# Altium PCB Flow_Pump显示板 - 副本.PcbDoc
Units mil, origin at the board's own origin, x right, y up, seen from the top; angles counter-clockwise.
Board outline 3661.42 x 3661.42 mil, 2 copper layers (Top Layer, Bottom Layer); 9 components, 0 nets, 67 pads, 0 vias.
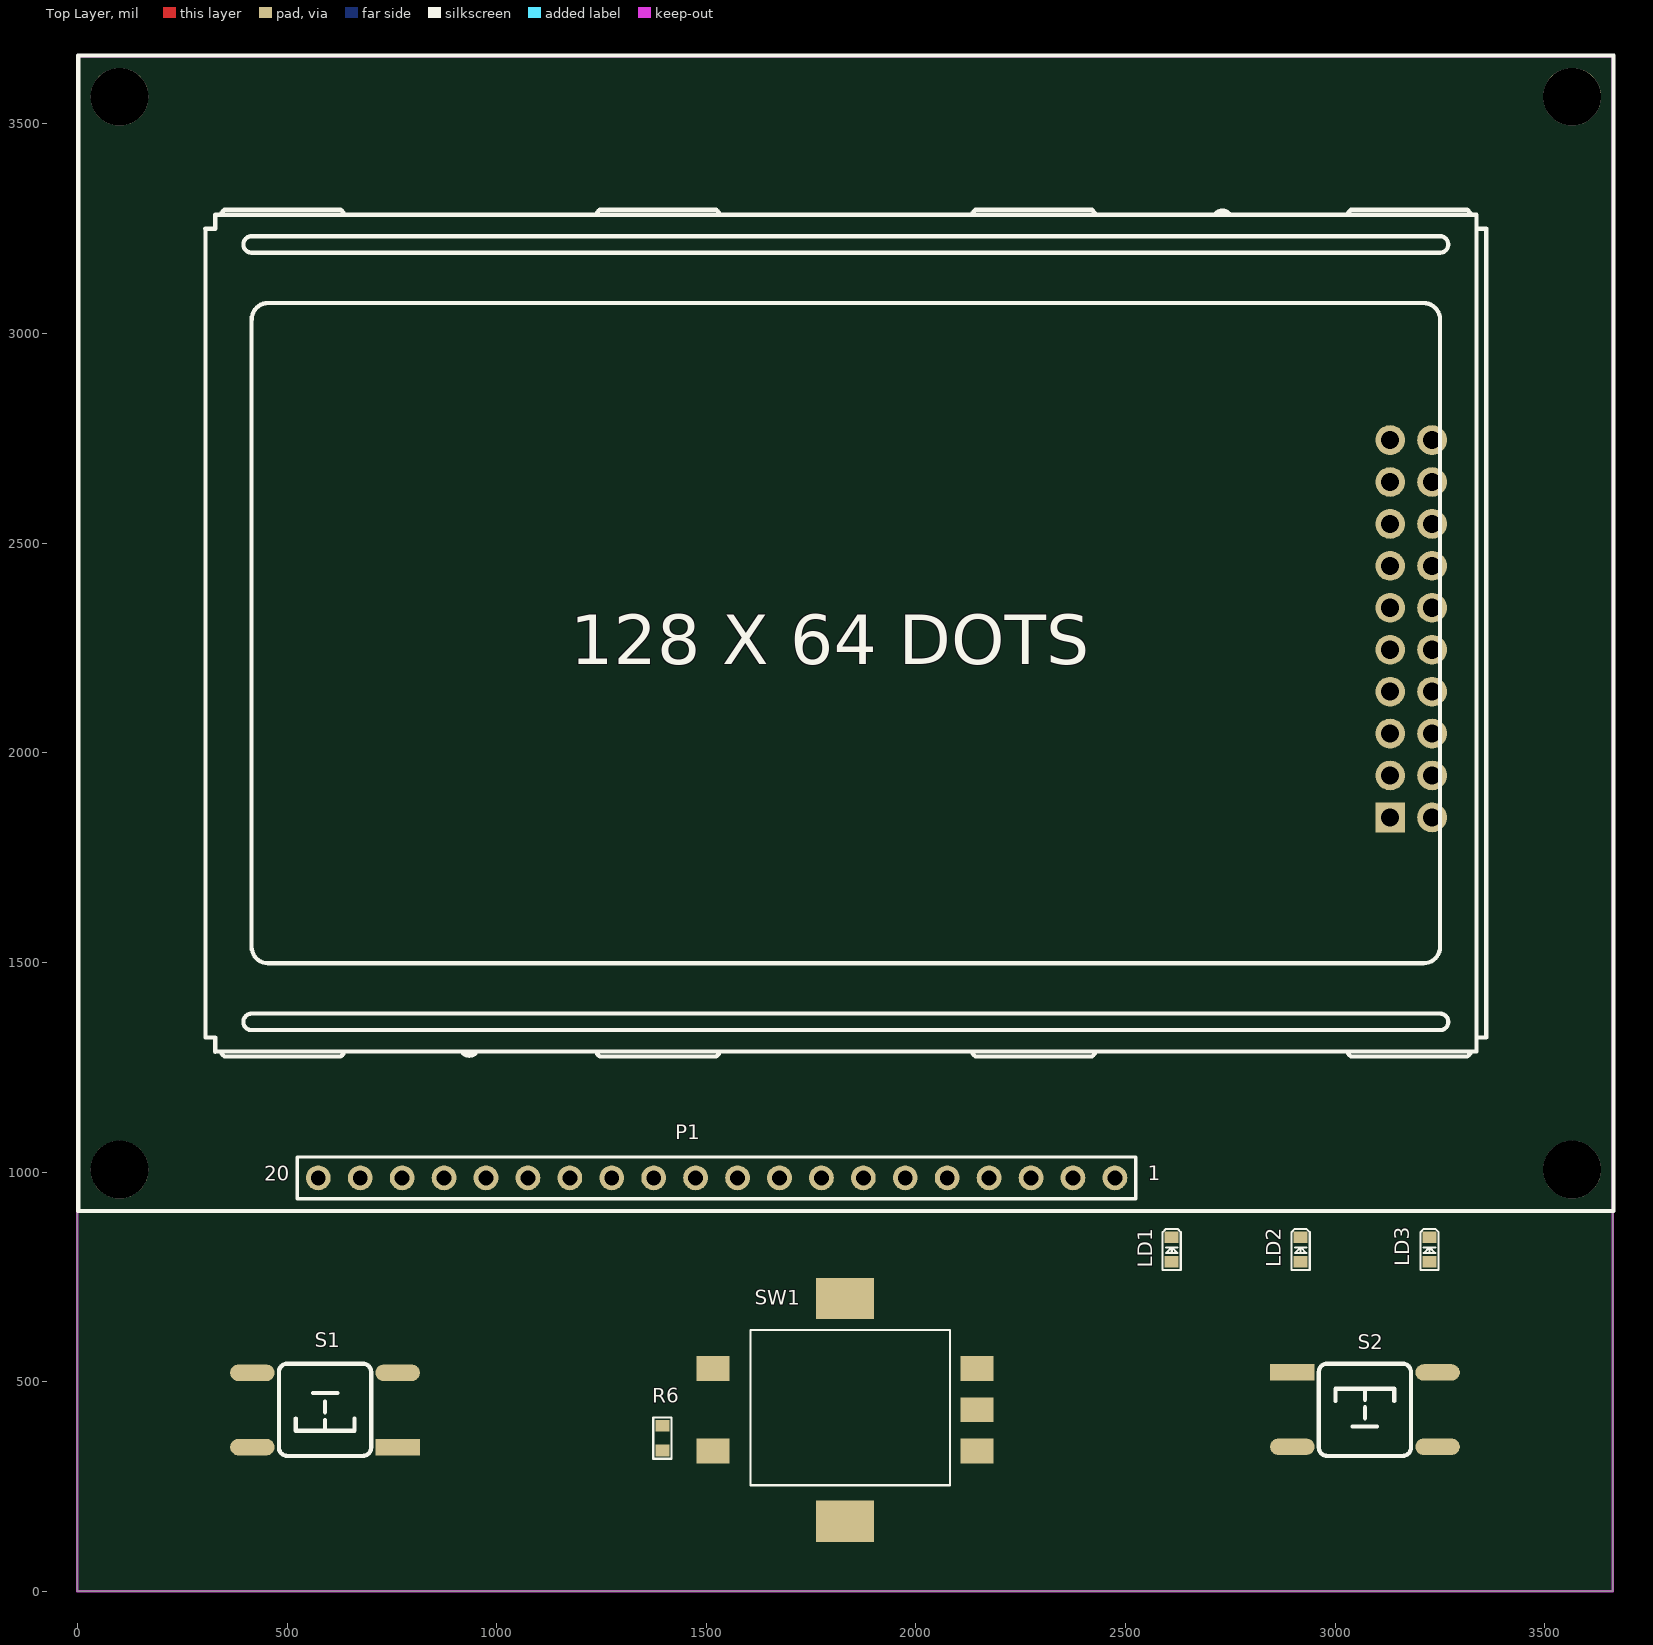
[diagram p0: Top Layer view]
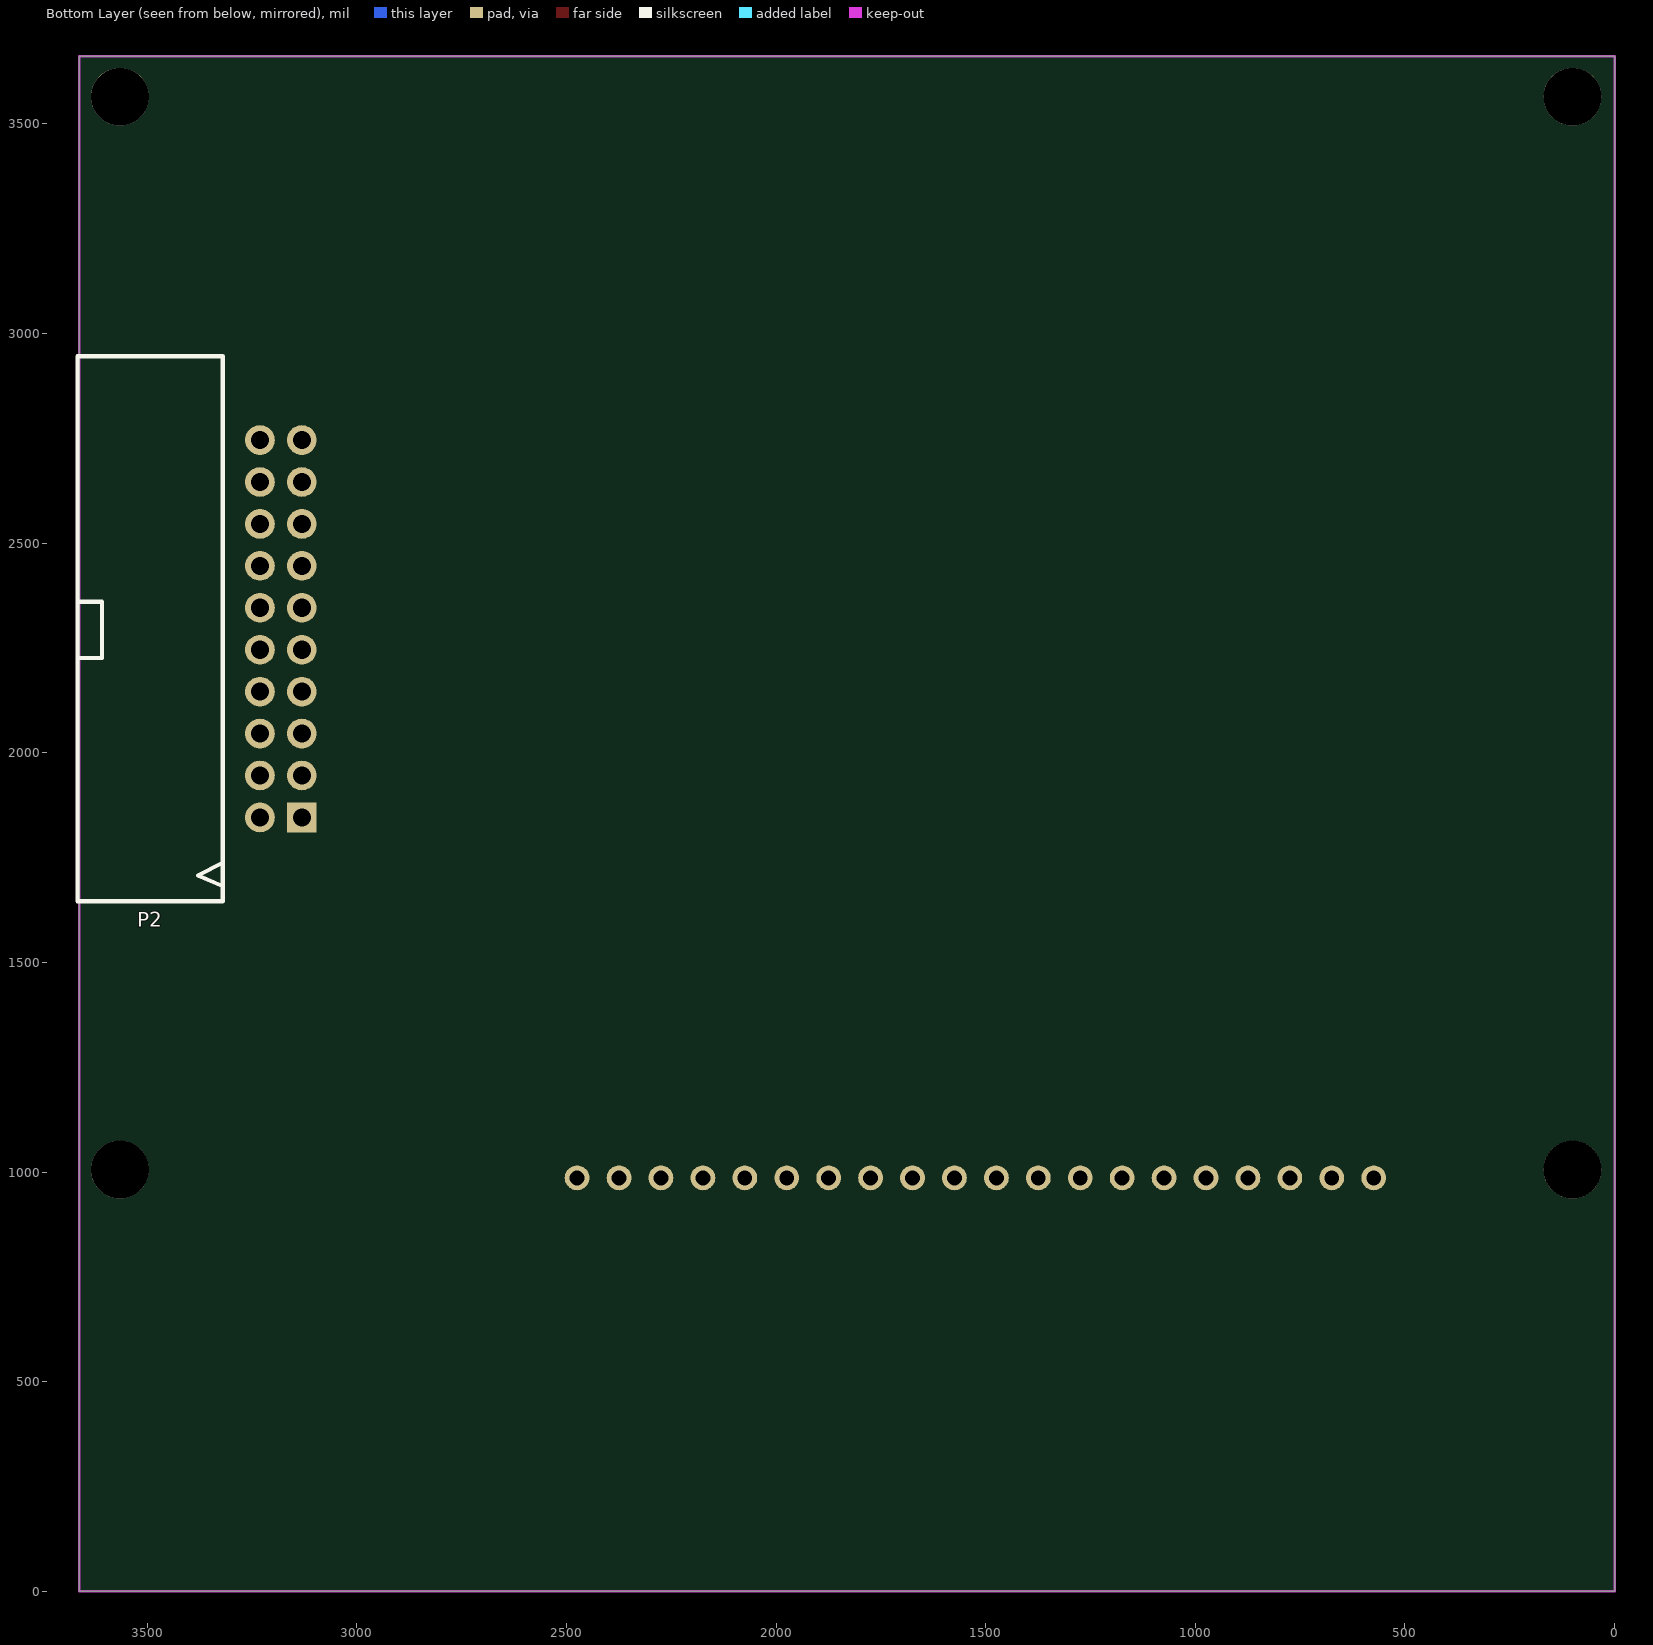
[diagram p1: Bottom Layer view, seen from below]

## Layer stack, top to bottom
Top Solder: solder mask 0.4, Solder Resist, Dk 3.5
Top Layer: signal copper 1.4
Dielectric 1: dielectric 12.6, FR-4, Dk 4.8
Bottom Layer: signal copper 1.4
Bottom Solder: solder mask 0.4, Solder Resist, Dk 3.5

## Board outline
0,0 3661.42,0 3661.42,3661.42 0,3661.42

## Design rules (kind name [scope] priority, off if disabled: settings)
Clearance [All] p1: gap=10
PolygonConnect [All] p1: connectstyle=Relief reliefconductorwidth=10 reliefentries=4 polygonreliefangle="90 Angle" airgapwidth=10
RoutingVias [All] p1: holewidth=28 width=50 viastyle="Through Hole" minholewidth=28 minwidth=50 maxholewidth=28 maxwidth=50
SolderMaskExpansion [All] p1: expansion=4
Width [All] p1: maxlimit=10 minlimit=10 preferedwidth=10
30 further rules are at their usual default settings.

## Components (designator, comment, footprint, x,y, rotation, side; value= is the part's Value field where it differs from the comment)
LD1 "LED_Green_19-217" 0603led 2610,786 r90 top
LD2 "LED_Green_19-217" 0603led 2917.5,786 r90 top
LD3 "LED_Green_19-217" 0603led 3225,786 r90 top
P1 "LCD12864" LCD12864 1517.05,1143.94 r0 top locked
P2 "Header 10X2" IDC-TH_20P-L33.0-W13.8-H-M-R2-C10-P2.54-S2.54-TR 3181,2296 r270 bottom
R6 "4.7K" 0603R 1395,395 r270 top
S1 "SW-PB" "TSW SMD-6*6*8" 590.55,433.07 r180 top locked
S2 "SW-PB" "TSW SMD-6*6*8" 3070.87,433.07 r0 top locked
SW1 "RE1103" EX1103S-D2-10 1830.71,433.07 r90 top locked

## Footprints (in the part's own frame and the unit in brackets; to place one, negate y for a bottom-side part, rotate by r counter-clockwise, add the part's x,y. Pads: shape width x height; smd on the part's side, far side on the other; paste and mask are expansions set on the pad)
0603led [mm]
  rect 0.7x0.85 smd: 1(0,0) 2(1.5,0)
  silkscreen extent -0.5,-0.55 2,0.55
0603R [mm]
  rect 0.7x0.85 smd: 1(0,0) 2(1.5,0)
  silkscreen extent -0.5,-0.55 2,0.55
EX1103S-D2-10 [mm]
  rect 1.5x2 smd: A(-2.5,-8) B(2.5,-8) C(0,-8) D(-2.5,8) E(2.5,8)
  rect 2.5x3.5 smd: A3(6.75,0) A4(-6.75,0)
  silkscreen extent -4.57,-6.35 4.83,5.71
IDC-TH_20P-L33.0-W13.8-H-M-R2-C10-P2.54-S2.54-TR [mm]
  rect 1.8x1.8 hole 1.1: 1(11.43,1.27)
  round 1.8 hole 1.1: 2(11.43,-1.27) 3(8.89,1.27) 4(8.89,-1.27) 5(6.35,1.27) 6(6.35,-1.27) 7(3.81,1.27) 8(3.81,-1.27) 9(1.27,1.27) 10(1.27,-1.27) 11(-1.27,1.27) 12(-1.27,-1.27) 13(-3.81,1.27) 14(-3.81,-1.27) 15(-6.35,1.27) 16(-6.35,-1.27) 17(-8.89,1.27) 18(-8.89,-1.27) 19(-11.43,1.27) 20(-11.43,-1.27)
  silkscreen extent -16.51,-12.32 16.51,-3.52
LCD12864 [mm] "Connector; Header; 5 Position"
  round 3.5 hole 3.5 unplated: 0(-35.982,-3.505) 0(-35.982,61.495) 0(52.018,-3.505) 0(52.018,61.495)
  round 1.5 hole 0.9: 1(24.318,-4.006) 2(21.778,-4.006) 3(19.238,-4.006) 4(16.698,-4.006) 5(14.158,-4.006) 6(11.618,-4.006) 7(9.078,-4.006) 8(6.538,-4.006) 9(3.998,-4.006) 10(1.458,-4.006) 11(-1.082,-4.006) 12(-3.622,-4.006) 13(-6.162,-4.006) 14(-8.702,-4.006) 15(-11.242,-4.006) 16(-13.782,-4.006) 17(-16.322,-4.006) 18(-18.862,-4.006) 19(-21.402,-4.006) 20(-23.942,-4.006)
  silkscreen extent -38.48,-6.01 54.52,64
"TSW SMD-6*6*8" [mm] "6*6*8mm"
  rect 2.7x1 smd: 1(-4.4,2.261)
  oval 2.7x1 smd: 2(-4.4,-2.239) 3(4.4,-2.239) 4(4.4,2.261)
  silkscreen extent -2.79,-2.79 2.79,2.79, body extent -4.5,-3 4.5,3, height 7.95

## Part data
P1: library part "Header 20", "Header, 20-Pin"
P2: "Header, 10-Pin, Dual row"
R6: library part RES2
S1 S2: "Switch"

## Nets (pads, with @x,y where several pads share a name; then routed paths per layer and width w, separated by ;. In a path a pad name is that pad's centre, name@x,y a point inside that pad or via, vN(x,y) a via of type N, cw(c..) or ccw(c..) an arc to the next point about the centre after c; other vN are vias at no path point)
pads on no net: LD1.1 LD1.2 LD2.1 LD2.2 LD3.1 LD3.2 P1.0 P1.1 P1.2 P1.3 P1.4 P1.5 P1.6 P1.7 P1.8 P1.9 P1.10 P1.11 P1.12 P1.13 P1.14 P1.15 P1.16 P1.17 P1.18 P1.19 P1.20 P2.1 P2.2 P2.3 P2.4 P2.5 P2.6 P2.7 P2.8 P2.9 P2.10 P2.11 P2.12 P2.13 P2.14 P2.15 P2.16 P2.17 P2.18 P2.19 P2.20 R6.1 R6.2 S1.1 S1.2 S1.3 S1.4 S2.1 S2.2 S2.3 S2.4 SW1.A SW1.A3 SW1.A4 SW1.B SW1.C SW1.D SW1.E

## Keep-outs
Keep-Out Layer:
  the board outline again, w6

## Silkscreen, mask and mechanical layers (free items; w line width, h text height)
Mechanical 1:
  the board outline again, w6

## Text inside footprints (layer, text, board x,y; h text height)
P1: Top Overlay "128 X 64 DOTS" at 1175.53,2211.91 h118.11; Top Overlay "1" at 2553.35,968.34 h60; Top Overlay "20" at 445.65,966.94 h60